# Altium PCB PCB.PcbDoc
Units mm, origin at the board's own origin, x right, y up, seen from the top; angles counter-clockwise.
Board outline 58 x 135 mm, 2 copper layers (Top Layer, Bottom Layer); 22 components, 23 nets, 131 pads, 0 vias.
Unrouted connection lines stored in the file: 4.
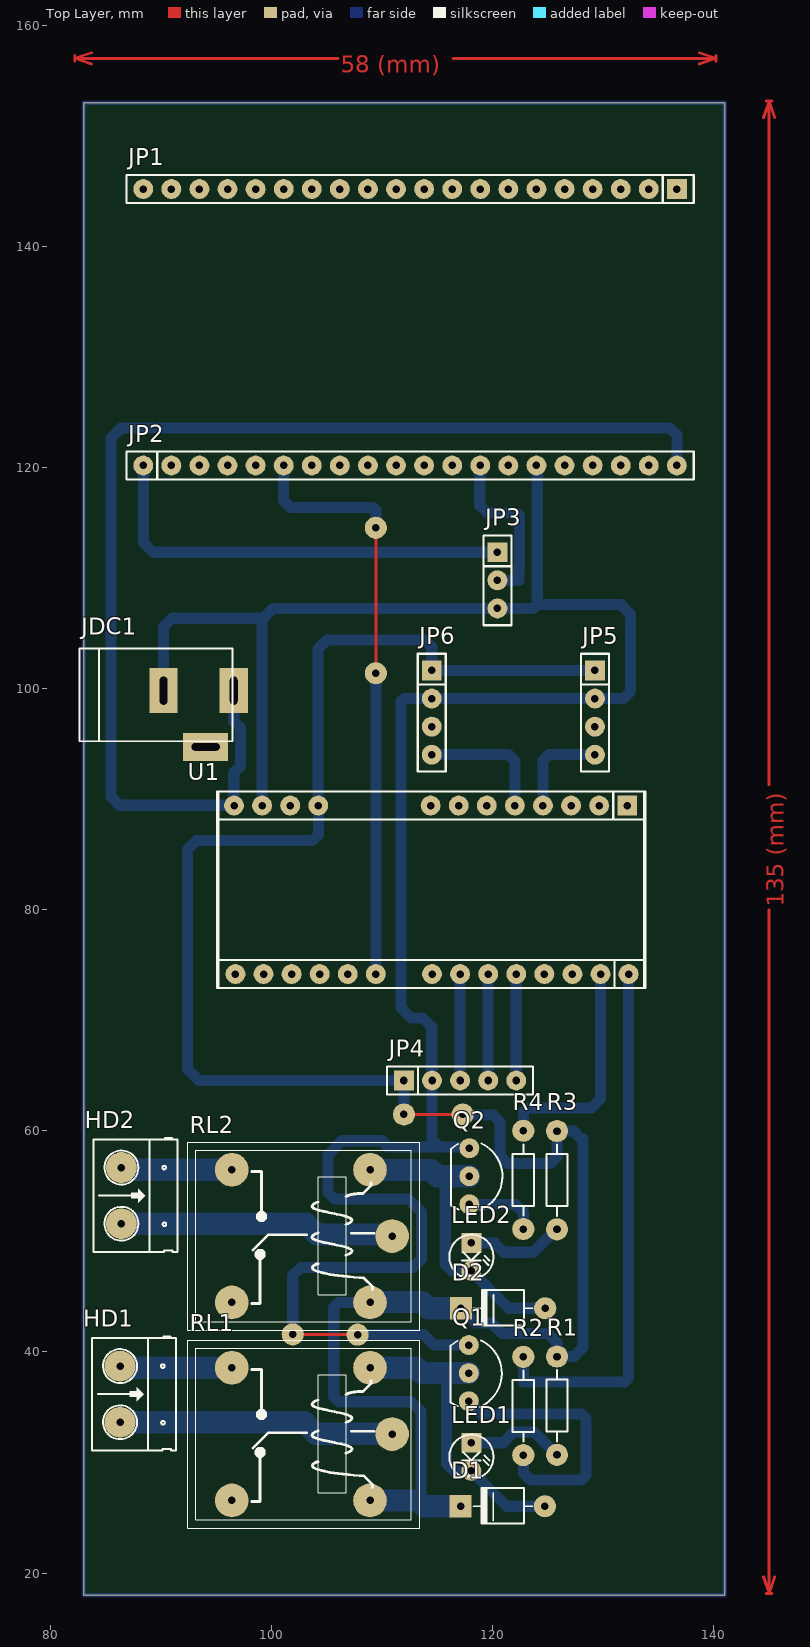
[diagram p0: Top Layer view]
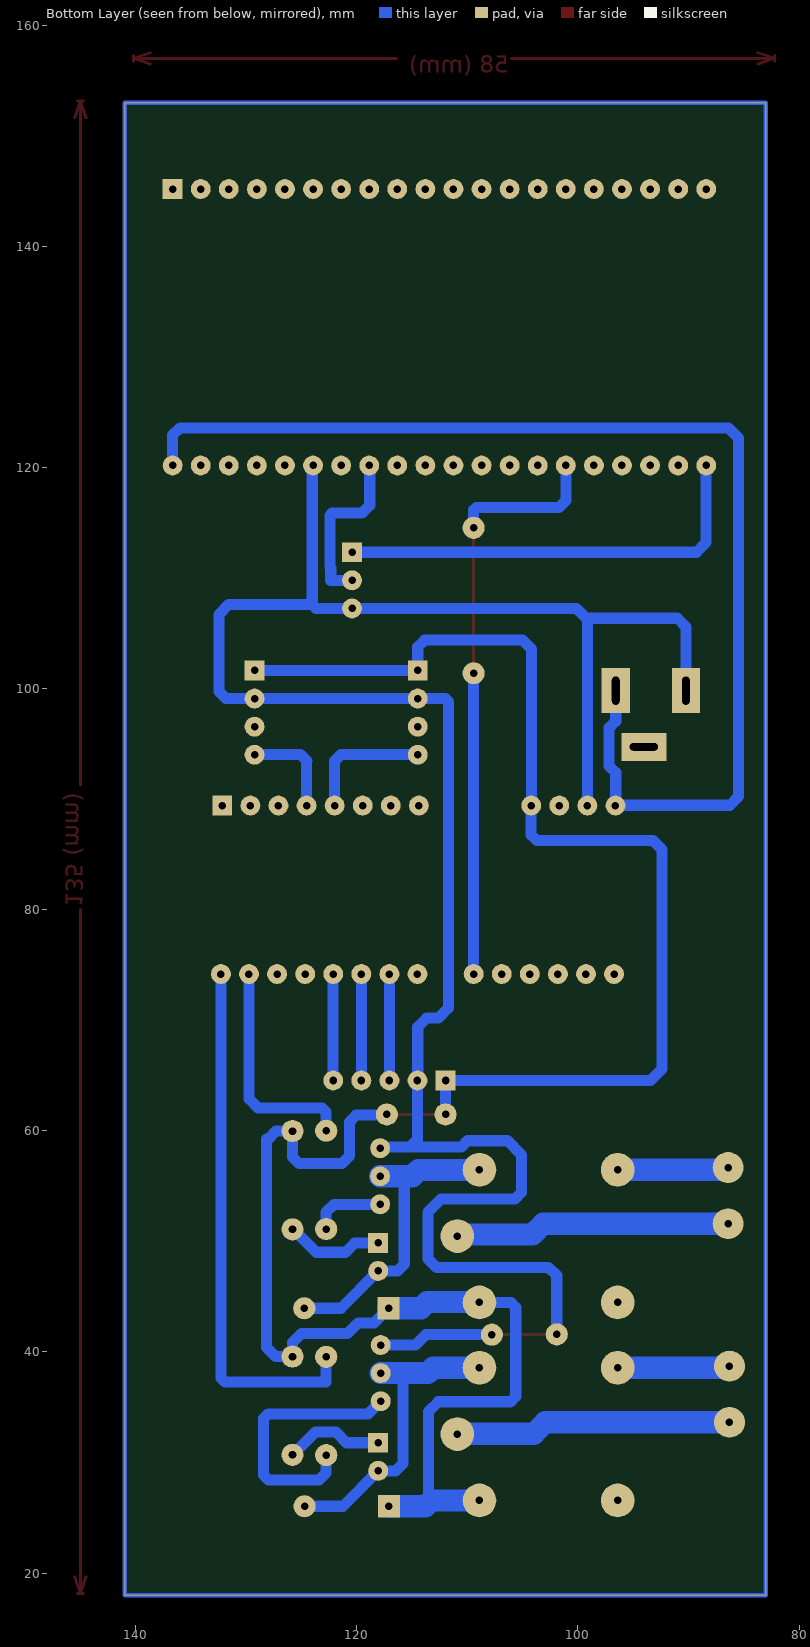
[diagram p1: Bottom Layer view, seen from below]

## Layer stack, top to bottom
Top Solder: solder mask 0.0102, Solder Resist, Dk 3.5
Top Layer: signal copper 0.0356
Dielectric 1: dielectric 0.32, FR-4, Dk 4.8
Bottom Layer: signal copper 0.0356
Bottom Solder: solder mask 0.0102, Solder Resist, Dk 3.5

## Board outline
83,18 141,18 141,153 83,153

## Design rules (kind name [scope] priority, off if disabled: settings)
Clearance [All] p1: gap=0.6
PolygonConnect [All] p1: connectstyle=Relief reliefconductorwidth=0.254 reliefentries=4 polygonreliefangle="90 Angle" airgapwidth=0.254
RoutingVias [All] p1: holewidth=0.711 width=1.27 viastyle="Through Hole" minholewidth=0.711 minwidth=1.27 maxholewidth=0.711 maxwidth=1.27
SolderMaskExpansion [All] p1: expansion=0.102
Width [All] p1: maxlimit=1 minlimit=0.254 preferedwidth=1 toplayer_maxwidth=0.254 toplayer_prefwidth=0.254 bottomlayer_minwidth=1 minimp=50.000000 maximp=50.000000 favimp=50.000000
30 further rules are at their usual default settings.

## Components (designator, comment, footprint, x,y, rotation, side; value= is the part's Value field where it differs from the comment)
D1 "4007" "DIODE 1A" 125.992,26.05 r0 top
D2 "4007" "DIODE 1A" 126.018,43.957 r0 top
HD1 "RL.BD" HED2 86.292,38.724 r270 top
HD2 "RL.DHT11" HED2 86.419,56.682 r270 top
JDC1 "Jac DC" DC-IN 93.404,97.271 r0 top
JP1 "ESP_1" "JP 1x20 CT"#1 136.657,145.181 r180 top
JP2 "ESP_2" "JP 1x20 CT"#2 88.396,120.181 r0 top
JP3 "DHT11" "JP 1x3 CT" 120.43,112.333 r270 top
JP4 "DS1302" "JP 1x5 CT" 111.971,64.556 r0 top
JP5 "CBAS" "JP 1x4 CT" 129.243,101.64 r270 top
JP6 "DAD" "JP 1x4 CT" 114.486,101.64 r270 top
LED1 "LED" LED-3 118.067,31.79 r270 top
LED2 "LED" LED-3 118.067,49.875 r270 top
Q1 "C1815" TO92 117.839,38.089 r270 top
Q2 "C1815" TO92 117.89,55.895 r270 top
R1 "1K" R1/4W 125.814,30.698 r90 top
R2 "330R" R1/4W 122.766,39.562 r270 top
R3 "1K" R1/4W 125.814,51.094 r90 top
R4 "330R" R1/4W 122.766,60.009 r270 top
RL1 "Relay1" RELAY1 102.396,32.704 r180 top
RL2 "Relay1" RELAY1 102.396,50.611 r180 top
U1 "ARDUINO NANO" "Arduino Nano" 113.749,82.819 r270 top

## Footprints (in the part's own frame and the unit in brackets; to place one, negate y for a bottom-side part, rotate by r counter-clockwise, add the part's x,y. Pads: shape width x height; smd on the part's side, far side on the other; paste and mask are expansions set on the pad)
"Arduino Nano" [mm]
  round 1.8 hole 0.68: 3V3(-6.604,15.875) 5V(-6.604,-9.525) A0(-6.604,10.795) A1(-6.604,8.255) A2(-6.604,5.715) A3(-6.604,3.175) A4(-6.604,0.635) AGND(8.636,-9.398) ARST(8.636,-11.938) D2(8.636,-6.858) D3(8.636,-4.318) D5(8.636,0.762) D6(8.636,3.302) D7(8.636,5.842) D8(8.636,8.382) D9(8.636,10.922) D10(8.636,13.462) D11(8.636,16.002) D12(8.636,18.542) GND(-6.604,-14.605) REF(-6.604,13.335) RST(-6.604,-12.065) RX0(8.636,-14.478) TX1(8.636,-17.018) VIN(-6.604,-17.145)
  round 0 all layers, no hole: A5(-6.604,-1.905) A6(-6.604,-4.445) A7(-6.604,-6.985) D4(8.636,-1.778)
  rect 1.8x1.8 hole 0.68: D13(-6.604,18.415)
  silkscreen extent -7.87,-18.67 9.91,20.06, body extent -8.11,-21.59 9.89,24.06, height 20.92
DC-IN [mm] "Jac DC input"
  rect 2.54x4.064 hole 0.68 slot 2.54 at 90 deg: 1(3.175,2.54) 2(-3.175,2.54)
  rect 4.064x2.54 hole 0.68 slot 2.54 at 0 deg: 3(0.635,-2.54)
  silkscreen extent -10.79,-2.03 3.05,6.35, body extent -10.42,-2.67 3.4,6.84, height 11.02
"DIODE 1A" [mm] "Diode 1A"
  round 2 hole 0.68: 1(-1.27,0)
  rect 2x2 hole 0.68: 2(-8.89,0)
  silkscreen extent -7.75,-1.55 -2.41,1.65, body extent -9.29,-1.55 -0.87,1.65, height 3.1
HED2 [mil] "Header 2, 2 pin, hight 300mil, Pin to Pin 200, Colour Green"
  round 110 hole 26.77: 1(0,0) 2(200,0)
  silkscreen extent -106,-100 300,200, body extent -92,-140 302,155, height 394
"JP 1x3 CT" [mm]
  rect 1.8x1.8 hole 0.68: 1(0,0)
  round 1.8 hole 0.68: 2(2.54,0) 3(5.08,0)
  silkscreen extent -1.52,-1.27 6.6,1.27, body extent -1.52,-1.25 6.6,1.25, height 8.51
"JP 1x4 CT" [mm]
  rect 1.8x1.8 hole 0.68: 1(0,0)
  round 1.8 hole 0.68: 2(2.54,0) 3(5.08,0) 4(7.62,0)
  silkscreen extent -1.52,-1.27 9.14,1.27, body extent -1.52,-1.25 9.14,1.25, height 8.51
"JP 1x5 CT" [mm]
  rect 1.8x1.8 hole 0.68: 1(0,0)
  round 1.8 hole 0.68: 2(2.54,0) 3(5.08,0) 4(7.62,0) 5(10.16,0)
  silkscreen extent -1.52,-1.27 11.68,1.27, body extent -1.52,-1.25 11.68,1.25, height 8.51
"JP 1x20 CT"#1 [mm] "20 row, straight, gold plating"
  rect 1.8x1.8 hole 0.68: 1(0,0)
  round 1.8 hole 0.68: 2(2.54,0) 3(5.08,0) 4(7.62,0) 5(10.16,0) 6(12.7,0) 7(15.24,0) 8(17.78,0) 9(20.32,0) 10(22.86,0) 11(25.4,0) 12(27.94,0) 13(30.48,0) 14(33.02,0) 15(35.56,0) 16(38.1,0) 17(40.64,0) 18(43.18,0) 19(45.72,0) 20(48.26,0)
  silkscreen extent -1.52,-1.27 49.78,1.27, body extent -1.52,-1.25 49.78,1.25, height 8.51
"JP 1x20 CT"#2 [mm] "20 row, straight, gold plating"
  round 1.8 hole 0.68: 1(0,0) 2(2.54,0) 3(5.08,0) 4(7.62,0) 5(10.16,0) 6(12.7,0) 7(15.24,0) 8(17.78,0) 9(20.32,0) 10(22.86,0) 11(25.4,0) 12(27.94,0) 13(30.48,0) 14(33.02,0) 15(35.56,0) 16(38.1,0) 17(40.64,0) 18(43.18,0) 19(45.72,0) 20(48.26,0)
  silkscreen extent -1.52,-1.27 49.78,1.27, body extent -1.52,-1.25 49.78,1.25, height 8.51
LED-3 [mm] "LED 2 PIN, 3ly Only colour"
  rect 1.8x1.8 hole 0.68: 1(0,0)
  round 1.8 hole 0.68: 2(2.54,0)
  silkscreen extent -0.73,-1.99 3,2.01, body extent -0.63,-1.9 2.87,1.9, height 5.52
R1/4W [mm] "R 1/4W, 2 Pin, 350mil"
  round 2 hole 0.68: 1(0,0) 2(8.89,0)
  silkscreen extent 1.22,-0.97 7.67,0.97, body extent -1.01,-1.19 9.79,1.21, height 2.83
RELAY1 [mil] "12V/10A, W400mil, L800mil,H 300mil"
  round 120 hole 26.77: 1(-335,5) 2(235.87,241.22) 3(235.87,-231.22) 4(-256.26,-231.22) 5(-256.26,241.22)
  silkscreen extent -433,-330 393,340, body extent -390,-296 365,310, height 591
TO92 [mm] "TO-92"
  round 1.8 hole 0.68: 1(-2.54,0) 2(0,0) 3(2.54,0)
  silkscreen extent -2.96,-1.65 3.05,2.99, body extent -2.77,-1.67 2.77,2.41, height 6.22

## Part data
D1 D2: library part "Diode 1N4007", "C?m"
HD1 HD2: library part Hed2, "Header 2 (Green)"
JDC1: library part DCIN, "Jac DC input"
JP1 JP2: library part "JP 1x20 2.54 Cai Thang", "C?m"
JP3: library part "JP 1x3 2.54 Cai Thang", "C?m"
JP4: library part "JP 1x5 2.54 Cai Thang", "C?m"
JP5 JP6: library part "JP 1x4 2.54 Cai Thang", "C?m"
LED1 LED2: "LED Single colour Green and Red"
Q1 Q2: "NPN transistor"
R1 R2 R3 R4: library part R1/4W, "Resistor 1/4W"
RL1 RL2: "Relay SPDT,10A - 12VDC 5 Pin"
U1: "ATMEGA328, ARDUINO NANO, EVAL BOARD"

## Free pads (board coordinates)
  round 2 hole 0.68: 0(109.431,101.386) 1(109.431,114.543) 2(117.28,61.483) 3(111.971,61.483) 4(107.78,41.569) 5(101.913,41.594)

## Nets (pads, with @x,y where several pads share a name; then routed paths per layer and width w, separated by ;. In a path a pad name is that pad's centre, name@x,y a point inside that pad or via, vN(x,y) a via of type N, cw(c..) or ccw(c..) an arc to the next point about the centre after c; other vN are vias at no path point)
3V3: JP2.1 JP3.1 U1.3V3 | length 39.4
  Bottom Layer w1: JP2.1 88.396,113.201 89.264,112.333 JP3.1
5V: D1.2 D2.2 JP4.1 JP5.1 JP6.1 pad.2 pad.3 R1.2 R3.2 RL1.5 RL2.5 U1.5V | length 200.7
  Top Layer w0.254: pad.3 pad.2
  Bottom Layer w1: RL2.5 106.073,44.484 105.621,44.033 105.621,35.981 106.104,35.498 112.632,35.498 113.529,34.602 113.529,26.859 113.247,26.577 ; pad.3 JP4.1 93.429,64.556 92.388,65.597 92.388,85.46 93.201,86.273 103.716,86.273 104.224,86.781 U1.5V 104.199,89.448 104.199,103.57 105.012,104.383 113.851,104.383 114.486,103.748 JP6.1 JP5.1 ; pad.2@117.026,61.406 117.051,61.432 120.049,61.432 120.666,60.814 120.666,57.715 121.319,57.063 125.23,57.063 125.814,57.647 R3.2 127.288,59.984 127.999,59.273 128.177,59.273 128.177,40.401 127.364,39.588 R1.2 125.814,40.858 125.002,41.671 120.838,41.671 119.88,42.629 118.455,42.629 D2.2
  Bottom Layer w2: RL1.5 113.247,26.577 113.775,26.05 D1.2 ; RL2.5 108.936,44.515 113.622,44.515 114.181,43.957 D2.2
A0: JP5.4 U1.A0 | length 9
  Bottom Layer w1: U1.A0 124.544,93.436 124.519,93.461 125.078,94.02 JP5.4
A1: JP6.4 U1.A1 | length 11.8
  Bottom Layer w1: JP6.4 121.42,94.02 122.004,93.436 U1.A1
CLK: JP1.1 JP4.3 U1.D6 | length 9.6
  Bottom Layer w1: JP4.3 U1.D6
D11: R4.1 U1.D11 | length 20.4
  Bottom Layer w1: R4.1 122.766,61.686 123.165,62.084 128.93,62.084 129.751,62.905 U1.D11
D12: R2.1 U1.D12 | length 48.5
  Bottom Layer w1: R2.1 122.766,37.276 131.936,37.276 132.291,37.632 U1.D12
DAT: JP4.4 U1.D7 | length 9.6
  Bottom Layer w1: JP4.4 U1.D7
G14: JP2.13 JP3.2 | length 15.4
  Bottom Layer w1: JP2.13 118.829,120.134 118.829,116.55 119.515,115.864 122.233,115.864 122.43,115.667 122.43,110.978 122.356,110.904 122.356,109.793 JP3.2
G35: JP2.6 pad.0 pad.1 U1.D3 | length 54.1
  Top Layer w0.254: pad.0 pad.1
  Bottom Layer w1: JP2.6 101.096,117.011 101.71,116.397 109.177,116.397 109.431,116.143 pad.1 pad.1@109.431,114.315 ; U1.D3 pad.0
GND: JDC1.2 JP1.14 JP1.20 JP2.15 JP3.3 JP4.2 JP5.2 JP6.2 pad.4 pad.5 Q1.1 Q2.1 U1.GND | length 213.2
  Top Layer w0.254: pad.5 101.938,41.569 pad.4
  Bottom Layer w1: JDC1.2 90.229,105.577 91.016,106.364 98.992,106.364 99.119,106.237 ; U1.GND 99.119,89.448 99.119,106.237 ; pad.5@101.938,41.569 pad.5 101.913,46.903 102.65,47.64 112.81,47.64 113.572,48.402 113.572,52.643 112.378,53.837 105.698,53.837 105.088,54.447 105.088,57.825 106.371,59.108 109.991,59.108 110.546,58.553 115.18,58.553 ; pad.4@108.212,41.569 113.749,41.569 114.689,40.629 Q1.1 ; Q2.1 117.771,58.553 115.18,58.553 ; JP2.15 124.03,120.108 124.03,107.602 ; 99.119,106.237 100.135,107.253 JP3.3 123.681,107.253 124.03,107.602 ; 115.18,58.553 114.511,59.222 JP4.2 114.486,64.581 114.486,69.407 113.673,70.22 112.606,70.22 111.692,71.135 111.692,98.821 111.971,99.1 JP6.2 JP5.2 131.834,99.1 132.469,99.735 132.469,106.72 131.587,107.602 124.03,107.602
NetD1_1: D1.1 LED1.2 Q1.2 RL1.4 | length 28.1
  Bottom Layer w1: 116.467,38.089 115.839,37.461 115.839,29.904 116.493,29.25 LED1.2 121.268,26.05 D1.1
  Bottom Layer w2: RL1.4 113.083,38.577 113.572,38.089 116.467,38.089 Q1.2
NetD2_1: D2.1 LED2.2 Q2.2 RL2.4 | length 28.1
  Bottom Layer w1: 116.315,55.895 115.705,55.285 115.705,47.944 116.315,47.335 LED2.2 121.446,43.957 D2.1
  Bottom Layer w2: RL2.4 108.936,56.453 114.41,56.453 114.969,55.895 116.315,55.895 Q2.2
NetHD1_1: HD1.1 RL1.3 | length 10.2
  Bottom Layer w2: HD1.1 86.439,38.577 RL1.3
NetHD1_2: HD1.2 RL1.1 | length 25.1
  Bottom Layer w2: HD1.2 102.954,33.644 103.996,32.603 110.879,32.603 RL1.1
NetHD2_1: HD2.1 RL2.3 | length 10.1
  Bottom Layer w2: HD2.1 86.617,56.484 RL2.3
NetHD2_2: HD2.2 RL2.1 | length 24.9
  Bottom Layer w2: HD2.2 103.132,51.602 104.097,50.637 110.752,50.637 RL2.1
NetLED1_1: LED1.1 R1.1 | length 9
  Bottom Layer w1: LED1.1 120.914,31.79 121.897,32.772 123.74,32.772 R1.1
NetLED2_1: LED2.1 R3.1 | length 9
  Bottom Layer w1: LED2.1 120.186,49.875 121.041,49.019 123.636,49.019 125.711,51.094 R3.1
NetQ1_3: Q1.3 R2.2 | length 24.1
  Bottom Layer w1: Q1.3 118.982,34.406 128.024,34.406 128.456,33.974 128.456,28.869 127.999,28.412 123.401,28.412 122.766,29.047 R2.2
NetQ2_3: Q2.3 R4.2 | length 6.7
  Bottom Layer w1: Q2.3 122.081,53.355 122.792,52.643 122.792,51.145 R4.2
RST: JP4.5 U1.D8 | length 9.6
  Bottom Layer w1: JP4.5 U1.D8
VIN: JDC1.1 JP2.20 U1.VIN | length 109.3
  Bottom Layer w1: JDC1.1 96.579,97.049 97.171,96.457 97.171,93.006 96.579,92.414 U1.VIN@96.579,89.448 ; U1.VIN U1.VIN@96.579,89.448 ; JP2.20 136.656,122.929 136,123.586 86.394,123.586 85.479,122.671 85.479,90.235 86.267,89.448 U1.VIN@96.579,89.448
pads on no net: JDC1.3 JP1.2 JP1.3 JP1.4 JP1.5 JP1.6 JP1.7 JP1.8 JP1.9 JP1.10 JP1.11 JP1.12 JP1.13 JP1.15 JP1.16 JP1.17 JP1.18 JP1.19 JP2.2 JP2.3 JP2.4 JP2.5 JP2.7 JP2.8 JP2.9 JP2.10 JP2.11 JP2.12 JP2.14 JP2.16 JP2.17 JP2.18 JP2.19 JP5.3 JP6.3 RL1.2 RL2.2 U1.A2 U1.A3 U1.A4 U1.A5 U1.A6 U1.A7 U1.AGND U1.ARST U1.D2 U1.D4 U1.D5 U1.D9 U1.D10 U1.D13 U1.REF U1.RST U1.RX0 U1.TX1
copper on no net: | length 572.2
  Top Layer w0.254: 82.199,156.746 82.199,157.254 ; 83.723,156.492 82.199,157 ; 83.723,157.508 82.199,157 ; 106,157 82.199,157 ; 116.397,157 140.199,157 ; 138.675,156.492 140.199,157 ; 138.675,157.508 140.199,157 ; 140.199,156.746 140.199,157.254 ; 144.492,19.68 145,18.156 ; 144.492,151.632 145,153.156 ; 144.746,18.156 145.254,18.156 ; 144.746,153.156 145.254,153.156 ; 145,80 145,18.156 ; 145,91.312 145,153.156 ; 145.508,19.68 145,18.156 ; 145.508,151.632 145,153.156
  Bottom Layer w0.4: 83,18 141,18 141,153 83,153 83,18

## Other copper
Top Layer:
  text "58 (mm)" at 106.254,155.687 h1.52
  text "135 (mm)" at 146.313,80.254 h1.52 r90